# Altium PCB Probe.PcbDoc (part 2 of 2)
Units mm, origin at the board's own origin, x right, y up, seen from the top; angles counter-clockwise.
Board outline 70.88 x 20 mm, 4 copper layers (Top, Ground, Signal/Power, Bottom), stack 1.516 mm thick; 62 components, 37 nets, 170 pads, 258 vias.
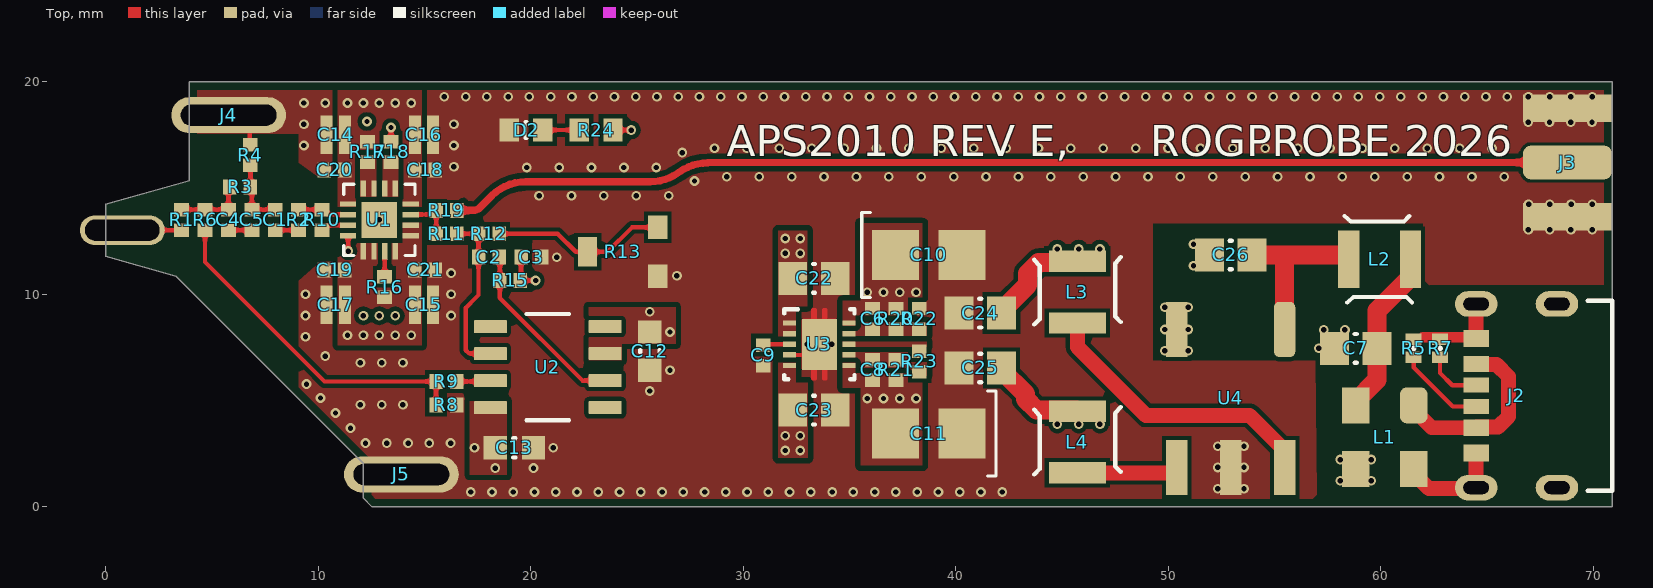
[diagram p0: Top view]

## Other copper (continued)
Top: (continued)
  pour cut-out: 11.781,14.6 11.781,12.4 13.981,12.4 13.981,14.6
  pour cut-out: 32.481,8.85 34.681,8.85 34.681,6.45 32.481,6.45
Signal/Power:
  pour cut-out: 33.372,14.2 33.372,20 46.156,20 46.156,14.2
Ground:
  pour cut-out: 56.981,0.267 56.908,6.874 49.263,6.874 49.263,13.35 61.981,13.35 61.981,10.437 70.688,10.442 70.688,0.242

## Silkscreen, mask and mechanical layers (free items; w line width, h text height)
Top Overlay:
  text "APS2010 REV E,      ROGPROBE 2026" at 29.229,16 h2.5
Bottom Overlay:
  text "BUF802 ACTIVE PROBE" at 54.752,17.45 h2.5
  text "50Ʊ OUT" at 69.931,15.533 h2.5
  text "JAMES WILSON 2024" at 54.854,13.31 h2.5
  text "SIGNAL INPUT / MAX ±30V" at 15.812,11.95 h2.5
  text "We" at 48.188,5.45 h6
  text "5V DC" at 69.663,4.292 h2.5
Top Solder:
  lines w2.232: 20.081,15.3 25.881,15.3
Board:
  lines w0.1: 3.301,10.855 12.131,2.025 12.131,0.403 12.535,0 14.156,0 70.881,0 70.881,20 3.931,20 3.931,15.367 ; 3.308,10.859 0,11.791 0,14.244 3.938,15.342

## Text inside footprints (layer, text, board x,y; h text height)
J3: Mechanical 13 "PCB EDGE" at 70.631,19.95 h1.02 r90
U1: Mechanical 8 "*" at 10.075,13.865 h1.27